# EAGLE board FPGA Shield Adapter (EAGLE 9.5.0)
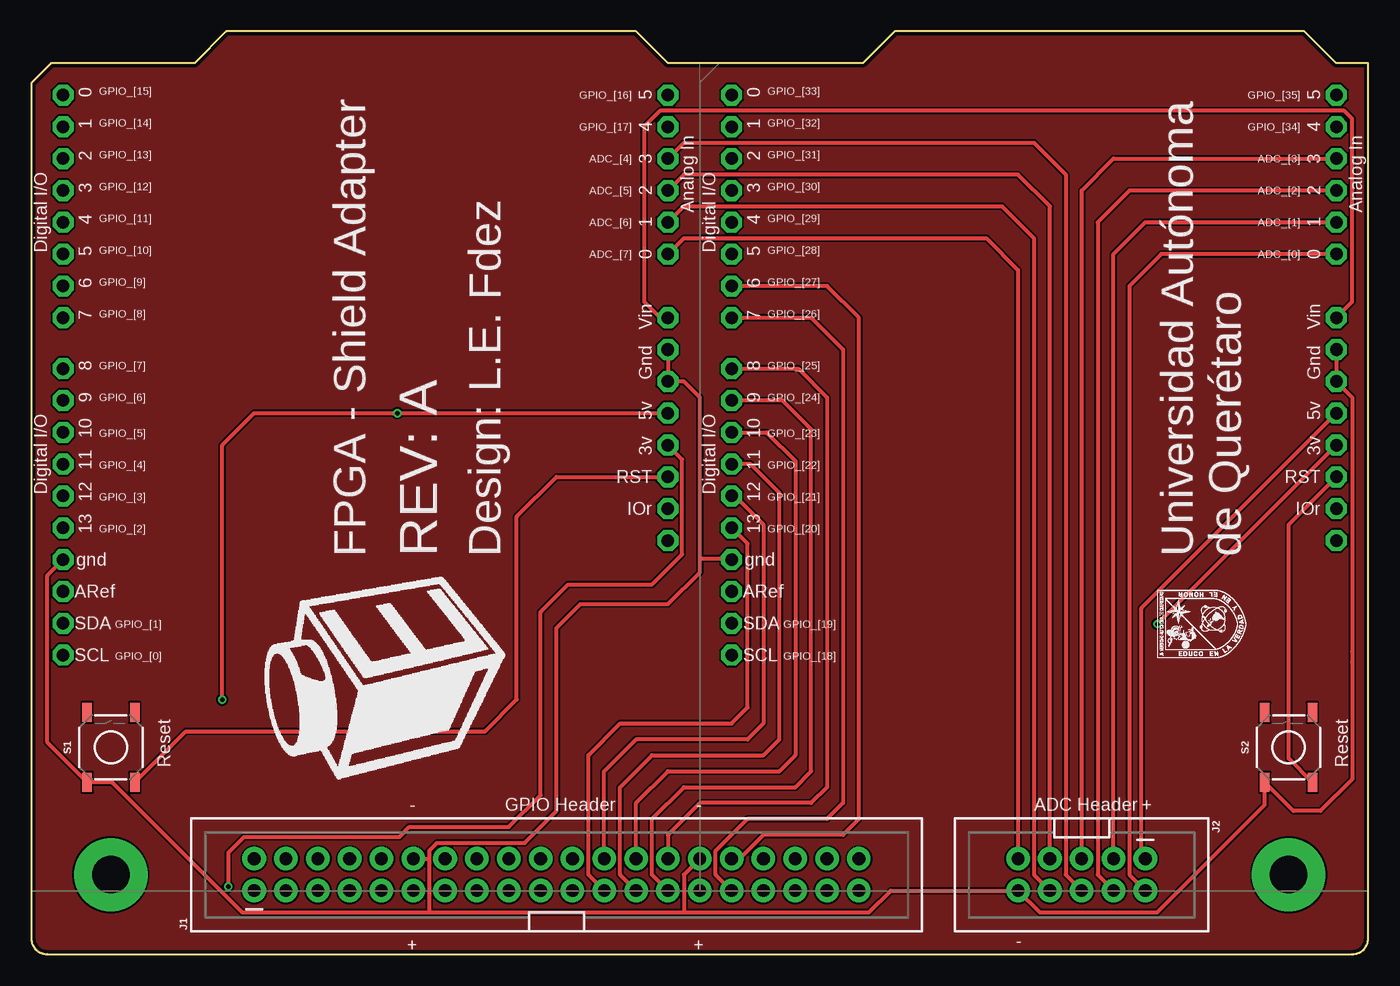
[diagram p0: board, top side]
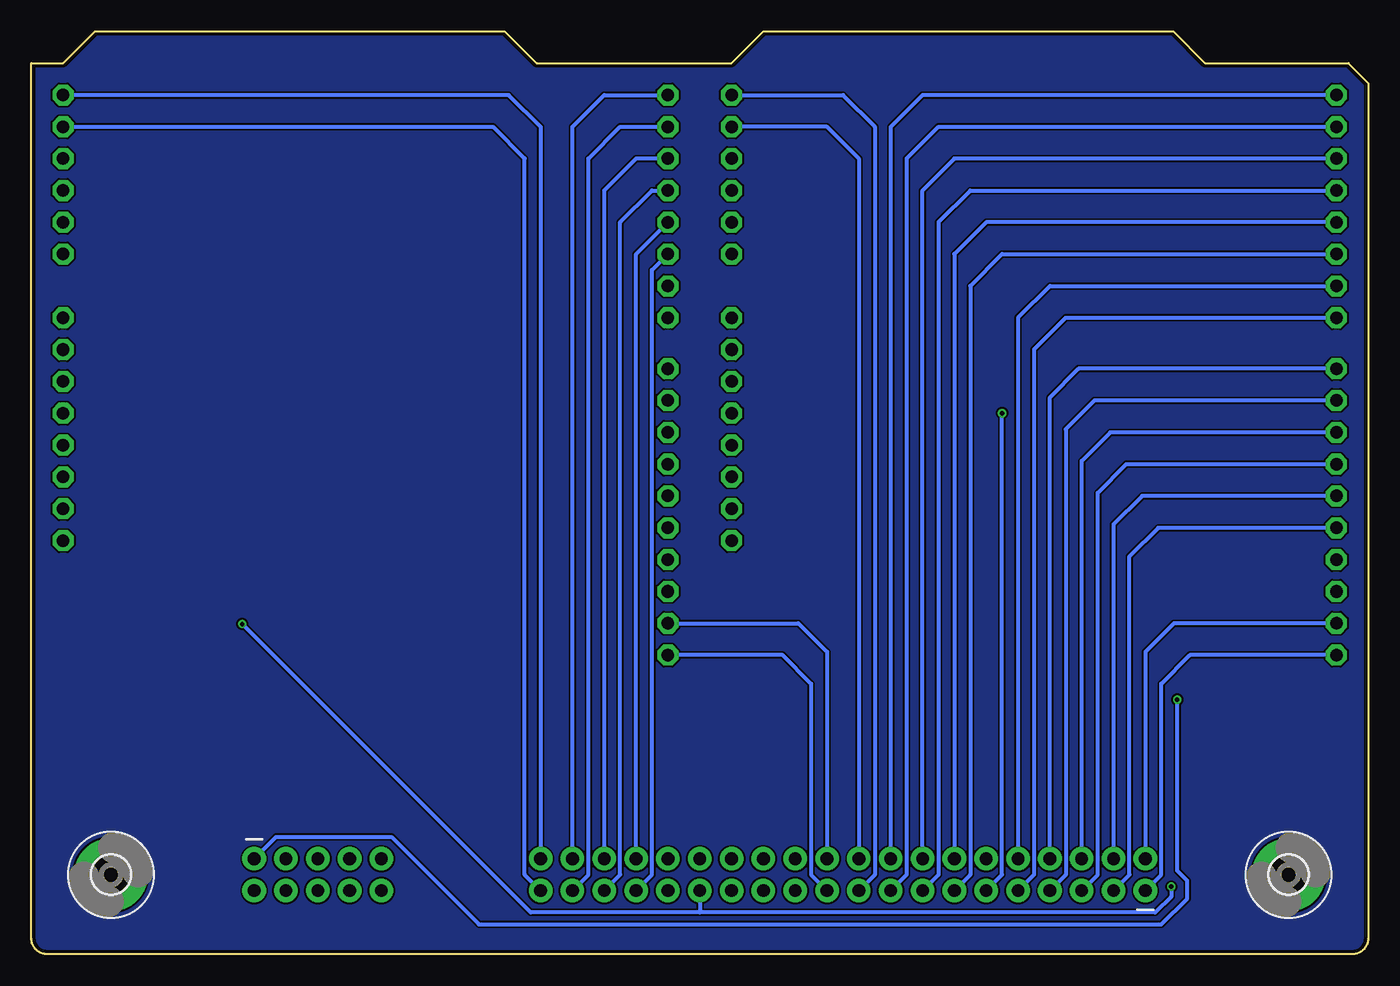
[diagram p1: board, bottom side, seen from below]

Size 106.68 x 73.66 mm. Coordinates in mm from the lower left corner, seen from the top.
Outline: 0,69.53 0,1.27 arc90 1.27,0 105.41,0 arc90 106.68,1.27 106.68,71.12 104.14,71.12 101.6,73.66 68.9,73.66 66.36,71.12 50.8,71.12 48.26,73.66 15.56,73.66 13.02,71.12 1.59,71.12 0,69.53
Copper layers (1*16): Top 0.035mm / dielectric 1.5mm / Bottom 0.035mm
Design rules "SeeedStudio_2layer_DRU_no_angle_20140221": minimum track width 6mil, minimum drill 12mil, track to track 6mil, track to pad 6mil, pad to pad 6mil, via to via 6mil, smd to smd 0mil, copper to edge 10mil, drill to drill 10mil, minimum pad ring 10mil, minimum via ring 6mil, stop-mask expansion 2mil, vias tented up to drill 100mil, thermal gap 10mil

## Footprints (pad centres in the part's own frame; a part is rotated, then mirrored left to right if it is on the bottom)
3,0-PAD = drill 3 pad 5.842: B3,0 0,0
2X20_SHROUDED = drill 1.016 pad 1.88: 1 -1.27,24.13; 2 1.27,24.13; 3 -1.27,21.59; 4 1.27,21.59; 5 -1.27,19.05; 6 1.27,19.05; 7 -1.27,16.51; 8 1.27,16.51; 9 -1.27,13.97; 10 1.27,13.97; 11 -1.27,11.43; 12 1.27,11.43; 13 -1.27,8.89; 14 1.27,8.89; 15 -1.27,6.35; 16 1.27,6.35; 17 -1.27,3.81; 18 1.27,3.81; 19 -1.27,1.27; 20 1.27,1.27; 21 -1.27,-1.27; 22 1.27,-1.27; 23 -1.27,-3.81; 24 1.27,-3.81; 25 -1.27,-6.35; 26 1.27,-6.35; 27 -1.27,-8.89; 28 1.27,-8.89; 29 -1.27,-11.43; 30 1.27,-11.43; 31 -1.27,-13.97; 32 1.27,-13.97; 33 -1.27,-16.51; 34 1.27,-16.51; 35 -1.27,-19.05; 36 1.27,-19.05; 37 -1.27,-21.59; 38 1.27,-21.59; 39 -1.27,-24.13; 40 1.27,-24.13
2X5-SHROUDED = drill 1.016 pad 1.88: 1 -1.27,5.08; 2 1.27,5.08; 3 -1.27,2.54; 4 1.27,2.54; 5 -1.27,0; 6 1.27,0; 7 -1.27,-2.54; 8 1.27,-2.54; 9 -1.27,-5.08; 10 1.27,-5.08
TACTILE_SWITCH_SMD_5.2MM = smd 1.524 x 0.762: 1 -2.794,1.905; 2 2.794,1.905; 3 -2.794,-1.905; 4 2.794,-1.905
ARDUINOR3-NODIM = drill 1 pad 1.676 octagon: 3V 35.56,2.54; 5V 38.1,2.54; A0 50.8,2.54; A1 53.34,2.54; A2 55.88,2.54; A3 58.42,2.54; A4 60.96,2.54; A5 63.5,2.54; AREF 23.876,50.8; D0 63.5,50.8; D1 60.96,50.8; D2 58.42,50.8; D3 55.88,50.8; D4 53.34,50.8; D5 50.8,50.8; D6 48.26,50.8; D7 45.72,50.8; D8 41.656,50.8; D9 39.116,50.8; D10 36.576,50.8; D11 34.036,50.8; D12 31.496,50.8; D13 28.956,50.8; GND 26.416,50.8; GND1 43.18,2.54; GND2 40.64,2.54; IOREF 30.48,2.54; RESERVED 27.94,2.54; RESET 33.02,2.54; SCL 18.796,50.8; SDA 21.336,50.8; VIN 45.72,2.54

## Placement (x,y rotation side)
H100  MOUNT-PAD-ROUND3.0  [3,0-PAD]  100.33,6.35 0 bottom
H101  MOUNT-PAD-ROUND3.0  [3,0-PAD]  6.35,6.35 0 bottom
J1  CONN_20X2SHROUDED  [2X20_SHROUDED]  41.91,6.35 90 top
J2  [2X5-SHROUDED]  83.82,6.35 270 top
S1  MOMENTARY-SWITCH-SPST-SMD-5.2MM  [TACTILE_SWITCH_SMD_5.2MM]  6.35,16.51 90 top
S2  MOMENTARY-SWITCH-SPST-SMD-5.2MM  [TACTILE_SWITCH_SMD_5.2MM]  100.33,16.51 90 top
U1  ARDUINOR3NODIM  [ARDUINOR3-NODIM]  53.34,5.08 90 top
U2  ARDUINOR3NODIM  [ARDUINOR3-NODIM]  106.68,5.08 90 top

## Library data of the parts
H100 H101 = holes
J1 = SparkFun-Connectors; PROD_ID: CONN-12263; SF_ID: CONN-12263
J2 = SparkFun-Connectors; PROD_ID: CONN-08671; SF_ID: PRT-08506
S1 S2 = SparkFun-Switches; PROD_ID: SWCH-08247; SF_SKU: COM-08720
U1 U2 = microbuilder

## Nets
3.3V: J1.29 U1.3V U2.3V
5V: J1.11 J2.1 U1.5V U2.5V
ADC_0: J2.2 U2.A0
ADC_1: J2.3 U2.A1
ADC_2: J2.4 U2.A2
ADC_3: J2.5 U2.A3
ADC_4: J2.6 U1.A3
ADC_5: J2.7 U1.A2
ADC_6: J2.8 U1.A1
ADC_7: J2.9 U1.A0
D0: J1.40 U2.A5
D1: J1.39 U2.A4
D2: J1.38 U2.D0
D3: J1.37 U2.D1
D4: J1.36 U2.D2
D5: J1.35 U2.D3
D6: J1.34 U2.D4
D7: J1.33 U2.D5
D8: J1.32 U2.D6
D9: J1.31 U2.D7
D10: J1.28 U2.D8
D11: J1.27 U2.D9
D12: J1.26 U2.D10
D13: J1.25 U2.D11
D14: J1.24 U2.D12
D15: J1.23 U2.D13
D16: J1.22 U2.SDA
D17: J1.21 U2.SCL
D18: J1.20 U1.A4
D19: J1.19 U1.A5
D20: J1.18 U1.D0
D21: J1.17 U1.D1
D22: J1.16 U1.D2
D23: J1.15 U1.D3
D24: J1.14 U1.D4
D25: J1.13 U1.D5
D26: J1.10 U1.D6
D27: J1.9 U1.D7
D28: J1.8 U1.D8
D29: J1.7 U1.D9
D30: J1.6 U1.D10
D31: J1.5 U1.D11
D32: J1.4 U1.D12
D33: J1.3 U1.D13
D34: J1.2 U1.SDA
D35: J1.1 U1.SCL
GND: J1.12 J1.30 J2.10 S1.1 S2.1 U1.GND U1.GND1 U1.GND2 U2.GND U2.GND1 U2.GND2
N$1: S2.3 U2.RESET
N$2: S1.3 U1.RESET
VIN: U1.VIN U2.VIN

## Tracks (layer width: path | path; a pad name or v marks a point on that pad's centre or on a via)
3.3V  (via drill 0.35)
  Top 0.305: U1.3V 51.94,39.5 51.94,31.91 49.53,29.5 42.83,29.5 40.64,27.3 40.64,12.7 38.1,10.16 30.16,10.16 29.37,9.37 16.99,9.37 15.72,8.1 v15.72,5.4 | v89.85,26.35 U2.3V
  Bottom 0.305: v89.85,26.35 66.83,3.33 53.34,3.33 | 53.34,3.33 16.99,3.33 15.72,4.6 v15.72,5.4 | J1.29 53.34,3.33
5V  (via drill 0.35)
  Top 0.305: U2.5V 88.58,27.62 88.58,7.94 J2.1 | U1.5V v29.21,43.18 17.78,43.18 15.24,40.64 v15.24,20.32
  Bottom 0.305: v15.24,20.32 15.24,6.67 14.45,5.87 14.45,4.45 16.51,2.38 70.96,2.38 77.95,9.37 87.15,9.37 J2.1 | J1.11 29.21,6.35 v29.21,43.18
ADC_0
  Top 0.305: U2.A0 90.17,55.88 87.63,53.34 87.63,6.35 J2.2
ADC_1
  Top 0.305: J2.3 86.36,55.88 88.9,58.42 U2.A1
ADC_2
  Top 0.305: U2.A2 87.63,60.96 85.09,58.42 85.09,6.35 J2.4
ADC_3
  Top 0.305: J2.5 83.82,60.96 86.36,63.5 U2.A3
ADC_4
  Top 0.305: U1.A3 52.07,64.77 80.01,64.77 82.55,62.23 82.55,6.35 J2.6
ADC_5
  Top 0.305: J2.7 81.28,59.69 78.74,62.23 52.07,62.23 U1.A2
ADC_6
  Top 0.305: U1.A1 52.07,59.69 77.47,59.69 80.01,57.15 80.01,6.35 J2.8
ADC_7
  Top 0.305: J2.9 78.74,54.61 76.2,57.15 52.07,57.15 U1.A0
COPPER
  pour Bottom: 1.27,0 105.41,0 arc90 106.68,1.27 106.68,71.12 104.14,71.12 101.6,73.66 68.9,73.66 66.36,71.12 50.8,71.12 48.26,73.66 15.56,73.66 13.02,71.12 1.59,71.12 0,69.53 0,1.27 arc90
  pour Top: 0,69.53 0,1.27 arc90 1.27,0 105.41,0 arc90 106.68,1.27 106.68,71.12 104.14,71.12 101.6,73.66 68.9,73.66 66.36,71.12 50.8,71.12 48.26,73.66 15.56,73.66 13.02,71.12 1.59,71.12
D0
  Bottom 0.305: U2.A5 68.58,68.58 66.04,66.04 J1.40
D1
  Bottom 0.305: U2.A4 69.85,66.04 67.31,63.5 67.31,6.35 J1.39
D2
  Bottom 0.305: U2.D0 60.96,68.58 63.5,66.04 J1.38
D3
  Bottom 0.305: U2.D1 59.69,66.04 62.23,63.5 62.23,6.35 J1.37
D4
  Bottom 0.305: U2.D2 58.42,63.5 60.96,60.96 J1.36
D5
  Bottom 0.305: U2.D3 57.15,60.96 59.69,58.42 59.69,6.35 J1.35
D6
  Bottom 0.305: U2.D4 58.42,55.88 J1.34
D7
  Bottom 0.305: U2.D5 57.15,54.61 57.15,6.35 J1.33
D8
  Top 0.305: U2.D6 63.5,53.34 66.04,50.8 66.04,10.79 64.77,9.53 58.42,9.53 56.52,7.62 J1.32
D9
  Top 0.305: U2.D7 62.23,50.8 64.77,48.26 64.77,12.06 63.5,10.79 57.15,10.79 54.61,8.26 54.61,6.35 J1.31
D10
  Top 0.305: U2.D8 61.21,46.74 63.5,44.45 63.5,13.34 62.23,12.06 53.34,12.06 50.8,9.53 J1.28
D11
  Top 0.305: U2.D9 59.94,44.2 62.23,41.91 62.23,14.61 60.96,13.34 52.07,13.34 49.53,10.79 49.53,6.35 J1.27
D12
  Top 0.305: U2.D10 58.67,41.66 60.96,39.37 60.96,15.88 59.69,14.61 50.8,14.61 48.26,12.06 J1.26
D13
  Top 0.305: U2.D11 57.4,39.12 59.69,36.83 59.69,17.14 58.42,15.88 49.53,15.88 46.99,13.34 46.99,6.35 J1.25
D14
  Top 0.305: U2.D12 56.13,36.58 58.42,34.29 58.42,18.41 57.15,17.14 48.26,17.14 45.72,14.61 J1.24
D15
  Top 0.305: U2.D13 57.15,32.77 57.15,19.68 55.88,18.41 46.99,18.41 44.45,15.88 44.45,6.35 J1.23
D16
  Bottom 0.305: U2.SDA 45.47,26.42 43.18,24.13 J1.22
D17
  Bottom 0.305: U2.SCL 46.74,23.88 44.45,21.59 44.45,6.35 J1.21
D18
  Bottom 0.305: U1.A4 43.18,66.04 40.64,63.5 J1.20
D19
  Bottom 0.305: U1.A5 41.91,68.58 39.37,66.04 39.37,6.35 J1.19
D20
  Bottom 0.305: U1.D0 35.56,68.58 38.1,66.04 J1.18
D21
  Bottom 0.305: U1.D1 34.29,66.04 36.83,63.5 36.83,6.35 J1.17
D22
  Bottom 0.305: U1.D2 33.02,63.5 35.56,60.96 J1.16
D23
  Bottom 0.305: U1.D3 31.75,60.96 34.29,58.42 34.29,6.35 J1.15
D24
  Bottom 0.305: U1.D4 30.48,58.42 33.02,55.88 J1.14
D25
  Bottom 0.305: U1.D5 29.21,55.88 31.75,53.34 31.75,6.35 J1.13
D26
  Bottom 0.305: U1.D6 25.4,53.34 27.94,50.8 J1.10
D27
  Bottom 0.305: U1.D7 24.13,50.8 26.67,48.26 26.67,6.35 J1.9
D28
  Bottom 0.305: U1.D8 23.11,46.74 25.4,44.45 J1.8
D29
  Bottom 0.305: U1.D9 21.84,44.2 24.13,41.91 24.13,6.35 J1.7
D30
  Bottom 0.305: U1.D10 20.57,41.66 22.86,39.37 J1.6
D31
  Bottom 0.305: U1.D11 19.3,39.12 21.59,36.83 21.59,6.35 J1.5
D32
  Bottom 0.305: U1.D12 18.03,36.58 20.32,34.29 J1.4
D33
  Bottom 0.305: U1.D13 16.76,34.04 19.05,31.75 19.05,6.35 J1.3
D34
  Bottom 0.305: U1.SDA 15.49,26.42 17.78,24.13 J1.2
D35
  Bottom 0.305: U1.SCL 14.22,23.88 16.51,21.59 16.51,6.35 J1.1
GND
  Top 0.305: 53.34,31.59 53.34,30.48 50.8,27.94 43.81,27.94 41.91,26.04 41.91,11.43 39.37,8.89 32.38,8.89 31.75,8.26 31.75,7.62 | 53.34,31.59 53.34,44.45 52.07,45.72 U1.GND2 U1.GND1 | U2.GND1 U2.GND2 105.41,44.45 105.41,24.13 105.41,23.32 105.41,13.97 102.87,11.43 100.71,11.43 S2.1 98.42,11.91 89.85,3.33 80.49,3.33 J2.10 68.58,5.08 66.83,3.33 52.07,3.33 | 53.34,31.59 55.88,31.59 U2.GND | 31.75,3.33 16.83,3.33 6.45,13.72 S1.1 1.27,16.89 1.27,30.23 U1.GND | 31.75,3.33 52.07,3.33 | 31.75,7.62 31.75,3.33 | J1.12 31.75,7.62 | J1.30 52.07,6.35 52.07,3.33
N$1
  Top 0.305: U2.RESET 100.33,34.29 100.33,15.62 S2.3
N$2
  Top 0.305: U1.RESET 41.91,38.1 38.73,34.92 38.73,20.32 36.2,17.78 12.32,17.78 S1.3
VIN
  Top 0.305: U2.VIN 105.41,52.07 105.41,66.67 104.78,67.31 50.16,67.31 48.9,66.04 48.9,52.07 50.16,50.8 U1.VIN

## Text on the board
tPlace: FPGA - Shield Adapter | REV: A | Design: L.E. Fdez | Universidad Autónoma / de Querétaro
tNames: GPIO_[15] | GPIO_[33] | GPIO_[16] | GPIO_[35] | GPIO_[14] | GPIO_[17] | GPIO_[32] | GPIO_[34] | GPIO_[13] | GPIO_[31] | ADC_[4] | ADC_[3] | GPIO_[12] | ADC_[5] | GPIO_[30] | ADC_[2] | GPIO_[11] | ADC_[6] | GPIO_[29] | ADC_[1] | GPIO_[10] | ADC_[7] | GPIO_[28] | ADC_[0] | GPIO_[9] | GPIO_[27] | GPIO_[8] | GPIO_[26] | GPIO_[7] | GPIO_[25] | GPIO_[6] | GPIO_[24] | GPIO_[5] | GPIO_[23] | GPIO_[4] | GPIO_[22] | GPIO_[3] | GPIO_[21] | GPIO_[2] | GPIO_[20] | GPIO_[1] | GPIO_[19] | GPIO_[0] | GPIO_[18] | Reset | Reset | - | GPIO Header | - | ADC Header | + | - | + | +